# Altium PCB Patil_PCB_20181208.PcbDoc
Units mil, origin at the board's own origin, x right, y up, seen from the top; angles counter-clockwise.
Board outline 6000 x 4000 mil, 2 copper layers (Top Layer, Bottom Layer); 105 components, 53 nets, 253 pads, 31 vias.
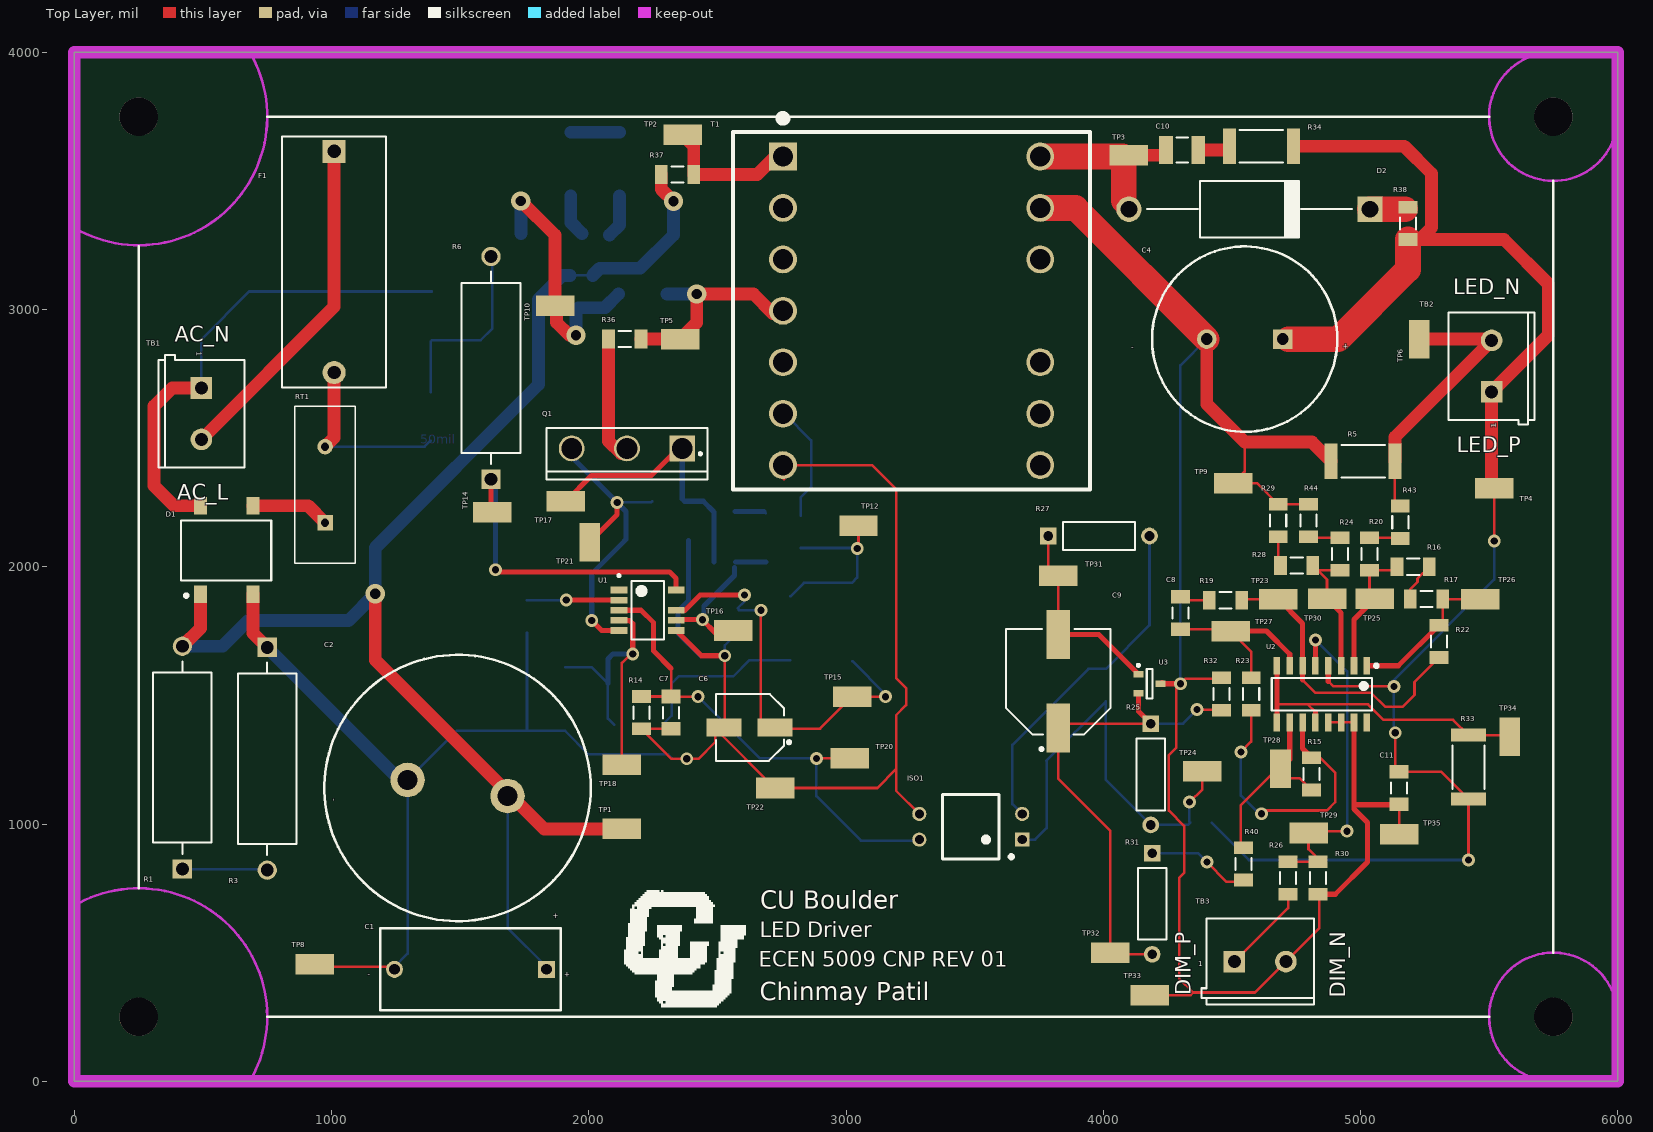
[diagram p0: Top Layer view]
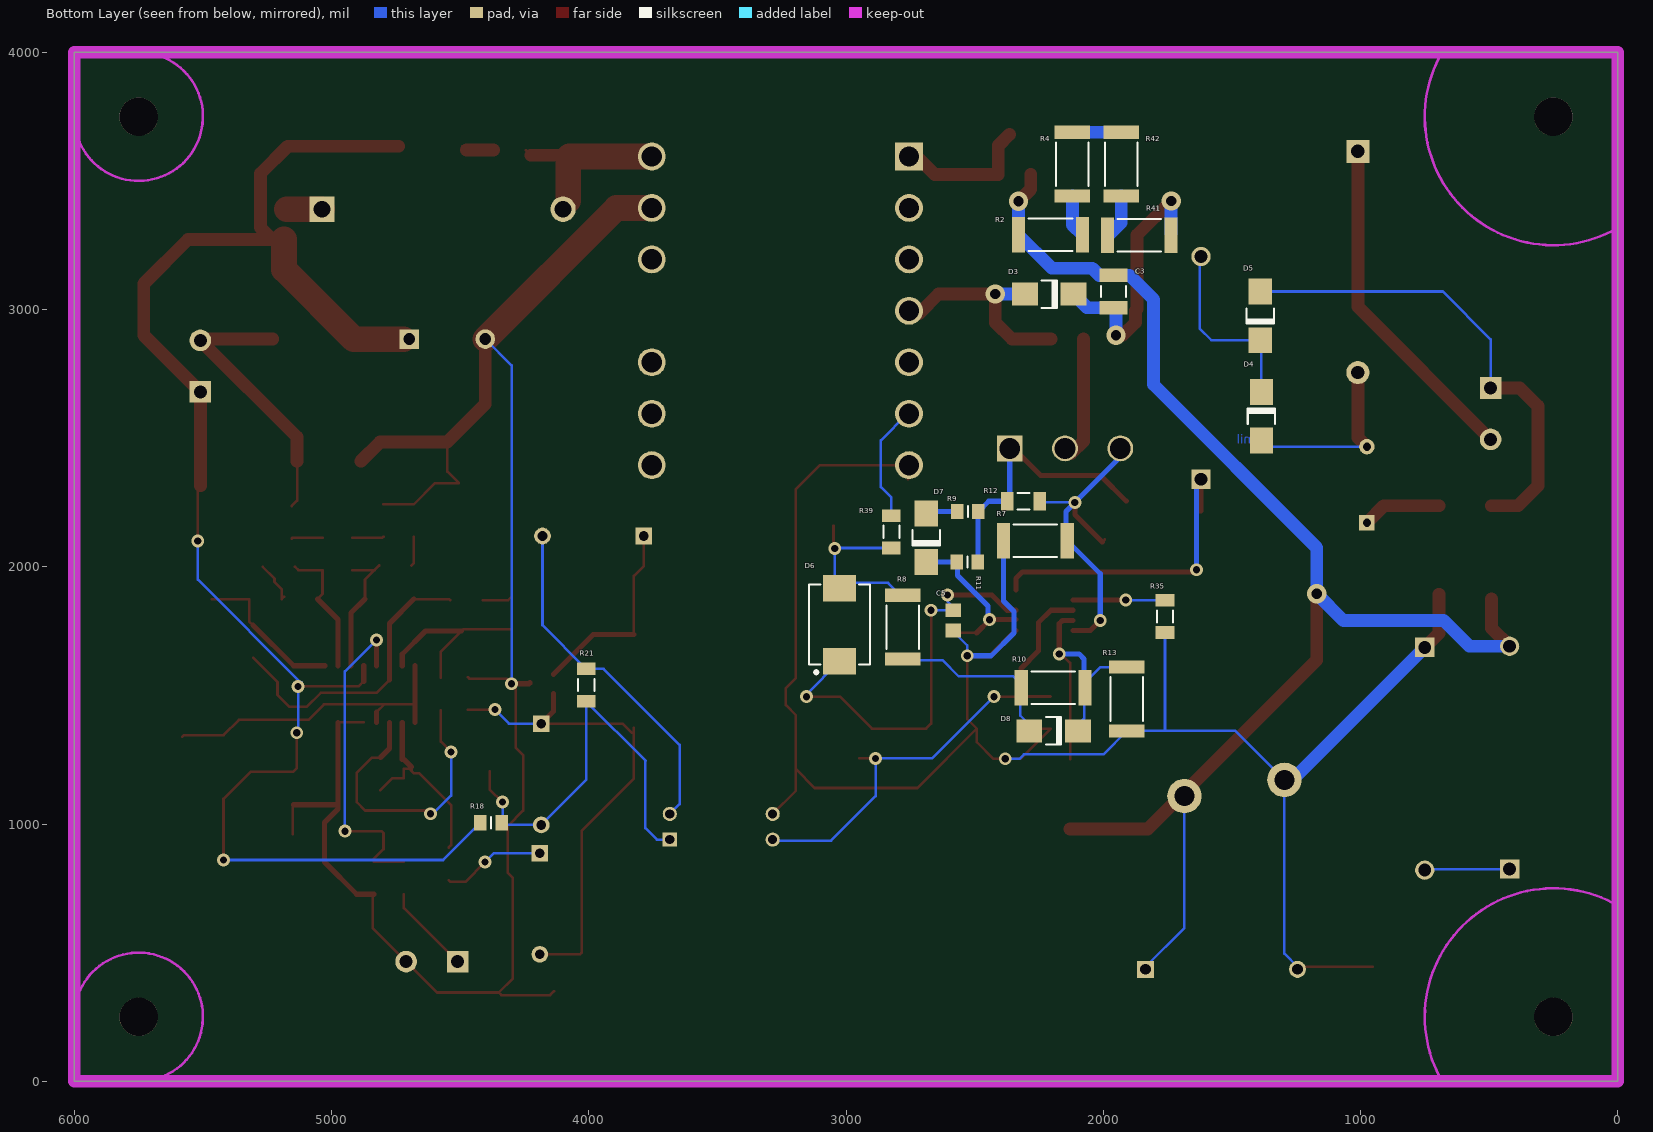
[diagram p1: Bottom Layer view, seen from below]

## Layer stack, top to bottom
Top Solder: solder mask 0.4, Solder Resist, Dk 3.5
Top Layer: signal copper 1.4
Dielectric 1: dielectric 12.6, FR-4, Dk 4.8
Bottom Layer: signal copper 1.4
Bottom Solder: solder mask 0.4, Solder Resist, Dk 3.5

## Board outline
0,0 0,4000 6000,4000 6000,0

## Design rules (kind name [scope] priority, off if disabled: settings)
BoardOutlineClearance [All] p1: gap=250 ignorepadtopadclearanceinfootprint=FALSE
Clearance [All] p1: gap=50 ignorepadtopadclearanceinfootprint=FALSE
HoleSize [All] p1: absolutevalues=TRUE maxlimit=300 minlimit=1 maxpercent=80.000 minpercent=20.000
PolygonConnect [All] p1: connectstyle=Relief reliefconductorwidth=10 reliefentries=4 polygonreliefangle="90 Angle" airgapwidth=10
RoutingVias [All] p1: holewidth=28 width=50 viastyle="Through Hole" minholewidth=28 minwidth=50 maxholewidth=28 maxwidth=50
SolderMaskExpansion [All] p1: expansion=4
UnRoutedNet [All] p1: checkbadconnections=TRUE
Width [All] p1: maxlimit=10 minlimit=10 preferedwidth=10
28 further rules are at their usual default settings.

## Classes and differential pairs
component class Patil_Sheet_2_20181105: C8 C9 C11 ISO1 R15 R16 R17 R18 R19 R20 R21 R22 R23 R24 R25 R26 R27 R28 R29 R30 R31 R32 R33 R40 R43 R44 TB3 TP23 TP24 TP25 TP26 TP27 TP28 TP29 TP30 TP31 TP32 TP33 TP34 TP35 U2 U3
component class Patil_Sheet_1_20181105: C1 C2 C3 C4 C5 C6 C7 C10 D1 D2 D3 D4 D5 D6 D7 D8 F1 Q1 R1 R2 R3 R4 R5 R6 R7 R8 R9 R10 R11 R12 R13 R14 R34 R35 R36 R37 R38 R39 R41 R42 RT1 T1 TB1 TB2 TP1 TP2 TP3 TP4 TP5 TP6 TP8 TP9 TP10 TP12 TP14 TP15 TP16 TP17 TP18 TP20 TP21 TP22 U1

## Components (designator, comment, footprint, x,y, rotation, side; value= is the part's Value field where it differs from the comment)
C1 "1 µF" "CAP-RAD-THRU-L17.5 X W7.8 X LS15.0 X H11.0MM" 1540,435 r180 top
C2 "150 µF" "CAP-SNAP_D25 X H35MM_A35" 1490,1140 r0 top
C3 "4.7 nF" CAP-1210M_IPC 1960,3070 r90 bottom
C4 "3.9 mF" "CAP-RAD-THRU-D18.0 X LS7.5 X H40.0MM" 4550,2885 r180 top
C5 "100 nF" CAP-0805M_IPC 2583.59,1791.57 r90 bottom
C6 "22 µF" CAPAE660X540M_CASE-D_IPC 2625,1375 r180 top
C7 "1 µF" CAP-1206M_IPC 2320,1432.8 r90 top
C8 "33 nF" CAP-1206M_IPC 4300,1820 r270 top
C9 "330 µF" CAPAE1030X1020M_CASE-G_IPC 3825,1555 r90 top
C10 "1 nF" CAP-1210M_IPC 4307.01,3620 r0 top
C11 "100 nF" CAP-1206M_IPC 5150,1139.96 r90 top
D1 "DF06S2" SOIC510P1040X260-4M_IPC 592.52,2065 r90 top
D2 "EGP30C" DIO-AXIAL-DO-201AD 4568.5,3390 r180 top
D3 "RS1M" DIODE-SMA-DO214AC 2210,3060 r0 bottom
D4 "RS1M" DIODE-SMA-DO214AC 1385,2585 r270 bottom
D5 "RS1M" DIODE-SMA-DO214AC 1390,2975 r90 bottom
D6 "ES3B" DIODE-SMC-DO214AB 3025,1775 r90 bottom
D7 "RS1A" DIODE-SMA-DO214AC 2688.59,2112.99 r90 bottom
D8 "RS1B" DIODE-SMA-DO214AC 2193.07,1361.93 r0 bottom
F1 "Fuse Holder" FUSE_HOLDER_3AG_4527 1010,3185 r270 top
ISO1 "FOD817A300W" DIP1016W7P254L51H57Q4A_IPC 3485,989.25 r90 top
Q1 "IPW90R340C3FKSA1" TO546P508X1588X2483-3A_IPC 2148.59,2460 r180 top
R1 "62.0 K" RES-AXIAL-2W_IPC 420,1257.99 r90 top
R2 "20.0 K" RES-2512M_IPC 2205,3290 r0 bottom
R3 "91.0 K" RES-AXIAL-2W_IPC 750,1253.54 r270 top
R4 "20.0 K" RES-2512M_IPC 2120,3565 r270 bottom
R5 "100m" RES-2512M_IPC 5010,2410 r0 top
R6 "2.00 K" RES-AXIAL-2W_IPC 1620,2773.07 r90 top
R7 "470 m" RES-2512M_IPC 2263.59,2100.94 r180 bottom
R8 "1.00 K" RES-2512M_IPC 2780,1765 r270 bottom
R9 "1.00" RES-0805M_IPC 2526.57,2214.56 r180 bottom
R10 "430 K" RES-2512M_IPC 2195,1530 r0 bottom
R11 "10.0" RES-0805M_IPC 2528.58,2018.5 r180 bottom
R12 "10.0 K" RES-1206M_IPC 2310,2254.56 r0 bottom
R13 "2.00 K" RES-2512M_IPC 1908.59,1485.94 r90 bottom
R14 "30.9 K" RES-1206M_IPC 2205,1432.8 r90 top
R15 "10.0 K" RES-1206M_IPC 4810,1195 r270 top
R16 "40.2 K" RES-1206M_IPC 5205,2000 r0 top
R17 "1.50 K" RES-1206M_IPC 5257.01,1874.37 r0 top
R18 "Jumper, 0805" RES-0805M_IPC 4380,1005 r180 bottom
R19 "10.0 K" RES-1206M_IPC 4475,1870 r180 top
R20 "1.00 K" RES-1206M_IPC 5035,2050 r90 top
R21 "1.43 K" RES-1206M_IPC 4010,1540 r270 bottom
R22 "301" RES-1206M_IPC 5305,1710 r270 top
R23 "10.0 K" RES-1206M_IPC 4575,1505 r270 top
R24 "1.00 K" RES-1206M_IPC 4920,2050 r90 top
R25 "13.7 K" RES-AXIAL-250mW_IPC 4185,1193.15 r270 top
R26 "10.0 K" RES-1206M_IPC 4718.58,790 r90 top
R27 "8.06 K" RES-AXIAL-250mW_IPC 3983.03,2119.56 r0 top
R28 "40.2 K" RES-1206M_IPC 4752.01,2005 r180 top
R29 "1.50 K" RES-1206M_IPC 4680,2180 r90 top
R30 "10.0 K" RES-1206M_IPC 4835,790 r90 top
R31 "8.06 K" RES-AXIAL-250mW_IPC 4190,690 r270 top
R32 "2.49 K" RES-1206M_IPC 4460,1505 r270 top
R33 "4.70 K" RES-2512M_IPC 5420,1221.42 r90 top
R34 "10.0 K" RES-2512M_IPC 4615,3635 r0 top
R35 "1.00 K" RES-1206M_IPC 1760,1807.2 r90 bottom
R36 "Jumper, 1206" RES-1206M_IPC 2140,2885 r0 top
R37 "Jumper, 1206" RES-1206M_IPC 2345,3525 r180 top
R38 "Jumper, 1206" RES-1206M_IPC 5185,3335 r90 top
R39 "Jumper, 1206" RES-1206M_IPC 2823.59,2135.94 r90 bottom
R40 "Jumper, 1206" RES-1206M_IPC 4545,845 r90 top
R41 "2.00 K" RES-2512M_IPC 1860,3289.02 r0 bottom
R42 "20.0 K" RES-2512M_IPC 1930,3565 r90 bottom
R43 "Jumper, 1206" RES-1206M_IPC 5155,2172.99 r90 top
R44 "Jumper, 1206" RES-1206M_IPC 4798.07,2180 r90 top
RT1 "12 Ohms" THERM-RADIAL-15.5MM_DIA_X6MM_THK 975,2319.17 r90 top
T1 "ETD29" TRANS508P3530X3520X2500-13A_IPC 3255,2995 r90 top
TB1 "INPUT" CONN_2-POS_TERMINAL_BLOCK_1729128 494.09,2595 r270 top
TB2 "LED MODULE" CONN_2-POS_TERMINAL_BLOCK_1729128 5510,2780 r90 top
TB3 "DIMMING VOLTAGE" CONN_2-POS_TERMINAL_BLOCK_1729128 4610,465 r0 top
TP1 "Test Point" TP_SMT_LOOP-5019_3D 2128.59,980.94 r0 top
TP2 "Test Point" TP_SMT_LOOP-5019_3D 2365,3680 r0 top
TP3 "Test Point" TP_SMT_LOOP-5019_3D 4100,3600 r0 top
TP4 "Test Point" TP_SMT_LOOP-5019_3D 5520,2305 r0 top
TP5 "Test Point" TP_SMT_LOOP-5019_3D 2355,2885 r0 top
TP6 "Test Point" TP_SMT_LOOP-5019_3D 5228.63,2885 r90 top
TP8 "Test Point" TP_SMT_LOOP-5019_3D 935,455 r0 top
TP9 "Test Point" TP_SMT_LOOP-5019_3D 4505,2325 r0 top
TP10 "Test Point" TP_SMT_LOOP-5019_3D 1870,3015 r180 top
TP12 "Test Point" TP_SMT_LOOP-5019_3D 3048.58,2159.56 r0 top
TP14 "Test Point" TP_SMT_LOOP-5019_3D 1625.05,2212.56 r180 top
TP15 "Test Point" TP_SMT_LOOP-5019_3D 3023.59,1495 r0 top
TP16 "Test Point" TP_SMT_LOOP-5019_3D 2562.09,1752.2 r0 top
TP17 "Test Point" TP_SMT_LOOP-5019_3D 1910.78,2255 r0 top
TP18 "Test Point" TP_SMT_LOOP-5019_3D 2128.44,1230.94 r0 top
TP20 "Test Point" TP_SMT_LOOP-5019_3D 3015,1255 r0 top
TP21 "Test Point" TP_SMT_LOOP-5019_3D 2003.58,2095.95 r270 top
TP22 "Test Point" TP_SMT_LOOP-5019_3D 2725,1140 r0 top
TP23 "Test Point" TP_SMT_LOOP-5019_3D 4680,1874.36 r180 top
TP24 "Test Point" TP_SMT_LOOP-5019_3D 4385,1205 r0 top
TP25 "Test Point" TP_SMT_LOOP-5019_3D 5055,1875 r0 top
TP26 "Test Point" TP_SMT_LOOP-5019_3D 5465,1874.36 r0 top
TP27 "Test Point" TP_SMT_LOOP-5019_3D 4495,1750 r0 top
TP28 "Test Point" TP_SMT_LOOP-5019_3D 4689.01,1215 r270 top
TP29 "Test Point" TP_SMT_LOOP-5019_3D 4798.07,965 r0 top
TP30 "Test Point" TP_SMT_LOOP-5019_3D 4870,1875 r0 top
TP31 "Test Point" TP_SMT_LOOP-5019_3D 3825,1965 r0 top
TP32 "Test Point" TP_SMT_LOOP-5019_3D 4027.76,500 r0 top
TP33 "Test Point" TP_SMT_LOOP-5019_3D 4180,335 r0 top
TP34 "Test Point" TP_SMT_LOOP-5019_3D 5580,1340 r90 top
TP35 "Test Point" TP_SMT_LOOP-5019_3D 5150,960 r0 top
U1 "NCP1340B3" SOIC100P600X175-9M 2228.59,1830.94 r0 top
U2 "TSM104WAID" SOIC127P600X175-16M_IPC 4850,1505 r270 top
U3 "TL431A" SOT95P230X124-3M_IPC 4180,1545 r0 top

## Footprints (in the part's own frame and the unit in brackets; to place one, negate y for a bottom-side part, rotate by r counter-clockwise, add the part's x,y. Pads: shape width x height; smd on the part's side, far side on the other; paste and mask are expansions set on the pad)
CAP-0805M_IPC [mm] "Chip Capacitor, C0805, Body 2.0x1.3mm, IPC Most Density"
  rect 1.35x1.55 smd: 1(-1,0) 2(1,0)
  body extent -1.1,-0.73 1.1,0.72, height 1.45
CAP-1206M_IPC [mm] "Chip Capacitor, C1206, Body 3.2x1.6mm, IPC Most Density"
  rect 1.35x1.9 smd: 1(-1.6,0) 2(1.6,0)
  silkscreen extent -0.55,-0.8 0.55,0.8, body extent -1.68,-0.87 1.67,0.86, height 1.9
CAP-1210M_IPC [mm] "Chip Capacitor, C1210, Body 3.2x2.5mm, IPC Most Density"
  rect 1.35x2.8 smd: 1(-1.6,0) 2(1.6,0)
  silkscreen extent -0.55,-1.25 0.55,1.25, body extent -1.7,-1.35 1.7,1.35, height 1.8
"CAP-RAD-THRU-D18.0 X LS7.5 X H40.0MM" [mil] "Capacitor, Radial Can, Dia.18.0mm, Height 40.0mm, Lead Space 7.5mm, Pin-1 Positive, Nichicon UHE Series"
  rect 76x76 hole 46: 1(-147.64,0)
  round 76 hole 46: 2(147.64,0)
  silkscreen extent -360,-360 360,360, body extent -354,-352 354,356, height 1575
"CAP-RAD-THRU-L17.5 X W7.8 X LS15.0 X H11.0MM" [mil] "Capacitor, Radial Film, Length 17.5mm, Width 7.8mm, Height 11.0mm, Lead Space 15.0mm, Pin-1 Positive, Panasonic ECW-F(D) Series"
  rect 66x66 hole 42: 1(-295.28,0)
  round 66 hole 42: 2(295.28,0)
  silkscreen extent -350,-159 350,159, body extent -344,-154 344,154, height 472
"CAP-SNAP_D25 X H35MM_A35" [mm] "Capacitor, Snap, 25 x 35mm, Nichicon A35 Size"
  round 3.4 hole 2: 1(4.936,-0.8) 2(-4.936,0.8)
  silkscreen extent -13.15,-13.15 13.15,13.15, body extent -13,-12.95 13,13.05, height 37
CAPAE660X540M_CASE-D_IPC [mm] "Capacitor, Alum Elec, Dia.6.3mm, Height 5.4mm, Base 6.6x6.6mm, Case-D, IPC Most Density"
  rect 3.45x1.8 smd: 1(-2.5,0) 2(2.5,0)
  silkscreen extent -4.05,-3.3 3.3,3.3, body extent -3.4,-3.4 3.4,3.4, height 5.4
CAPAE1030X1020M_CASE-G_IPC [mm] "Capacitor, Alum Elec, Dia.10.0mm, Height 10.2mm, Base 10.3x10.3mm, Case-G. IPC Most Density"
  rect 4.85x2.3 smd: 1(-4.6,0) 2(4.6,0)
  silkscreen extent -6.85,-5.15 5.15,5.15, body extent -5.25,-5.25 5.25,5.25, height 10.2
CONN_2-POS_TERMINAL_BLOCK_1729128 [mil] "CONN TERM BLOCK 2POS 5.08MM PCB"
  rect 84x84 hole 51.18: 1(-100,0)
  round 84 hole 51.18: 2(100,0)
  silkscreen extent -227,-167 209,167, body extent -222,-159 200,160, height 394
DIO-AXIAL-DO-201AD [mm] "Axial Device, Thru-Hole; 2 Leads; 23.8mm Pin Spacing"
  rect 2.5x2.5 hole 1.65: 1(-11.9,0)
  round 2.5 hole 1.65: 2(11.9,0)
  silkscreen extent -10.1,-2.8 10.1,2.8, body extent -5,-2.9 5,2.9, height 4.9
DIODE-SMA-DO214AC [mm] "DO-214-AC/SMA; 2 C-Bend Leads; Body 5.3 x 2.6 mm, inc. leads (LxW) Pin 1 Cathode"
  rect 2.55x2.3 smd: 1(-2.4,0) 2(2.4,0)
  silkscreen extent -0.75,-1.35 0.75,1.35, body extent -2.85,-1.43 2.85,1.43, height 2.95
DIODE-SMC-DO214AB [mm] "DO-214-AB/SMC; 2 C-Bend Leads; Body 7.94 x 5.9 mm, inc. leads (LxW) Pin 1 Cathode"
  rect 2.6x3.25 smd: 1(-3.6,0) 2(3.6,0)
  silkscreen extent -4.85,-3 3.95,3, body extent -4,-3.1 4,3.1, height 2.7
DIP1016W7P254L51H57Q4A_IPC [mm] "DIP Wide, 4-Pin, Row Spacing 10.16mm (400mil), Pitch 2.54mm (100mil), Body 5.1mm (201mil) X 7mm (276mil) Max, IPC MOST"
  rect 1.4x1.4 hole 0.9: 1(-1.27,-5.08)
  round 1.4 hole 0.9: 2(1.27,-5.08) 3(1.27,5.08) 4(-1.27,5.08)
  silkscreen extent -3.17,-4.1 3.17,2.8, body extent -2.55,-3.5 2.55,3.5, height 5.7
FUSE_HOLDER_3AG_4527 [mil] "FUSE HLDR CARTRIDGE 250V 5A PCB"
  rect 90x90 hole 52: 1(-430,0)
  round 90 hole 52: 2(430,0)
  silkscreen extent -488,-203 488,203, body extent -475,-191 476,191, height 425
RES-0805M_IPC [mm] "Chip Resistor, R0805, Body 2.0x1.3mm, IPC Most Density"
  rect 1.25x1.5 smd: 1(-1.05,0) 2(1.05,0)
  silkscreen extent 0,-0.55 0,0.55, body extent -1.1,-0.67 1.1,0.67, height 0.7
RES-1206M_IPC [mm] "Chip Resistor, R1206, Body 3.2x1.6mm, IPC Most Density"
  rect 1.25x1.85 smd: 1(-1.6,0) 2(1.6,0)
  silkscreen extent -0.6,-0.8 0.6,0.8, body extent -1.68,-0.87 1.67,0.86, height 0.84
RES-2512M_IPC [mm] "Chip Resistor, R2512, Body 6.3x3.2mm, IPC Most Density"
  rect 1.3x3.5 smd: 1(-3.15,0) 2(3.15,0)
  silkscreen extent -2.15,-1.6 2.15,1.6, body extent -3.25,-1.7 3.25,1.7, height 0.9
RES-AXIAL-2W_IPC [mm] "Axial 2W Device, Thru-Hole; 2 Leads; 20mm in Pin Spacing"
  rect 1.905x1.905 hole 1.27: 1(-11,0)
  round 1.905 hole 1.27: 2(11,0)
  silkscreen extent -9.5,-2.9 9.5,2.9, body extent -8.25,-2.75 8.25,2.75, height 6.25
RES-AXIAL-250mW_IPC [mm] "Axial 250mW Device, Thru-Hole; 2 Leads; 10mm Pin Spacing"
  rect 1.65x1.65 hole 0.95: 1(-5,0)
  round 1.65 hole 0.95: 2(5,0)
  silkscreen extent -3.55,-1.4 3.55,1.4, body extent -3.45,-1.29 3.45,1.29, height 3.3
SOIC100P600X175-9M [mm] "SOIC, 9-Leads, Body 5.30x3.90mm, Pitch 1.00mm, IPC Mosy Density"
  rect 1.65x0.65 smd: 1(-2.825,2) 2(-2.825,1) 3(-2.825,0) 4(-2.825,-1) 5(-2.825,-2) 6(2.825,-2) 7(2.825,-1) 8(2.825,0) 9(2.825,2)
  silkscreen extent -2.95,-2.9 1.6,3.54, body extent -2,-2.9 2,2.9, height 1.75
SOIC127P600X175-16M_IPC [mm] "SOIC, 16-Leads, Body W4.00xL10.00mm, Pitch 1.27mm, H1.75mm, IPC MOST Density"
  rect 1.75x0.65 smd: 1(-2.8,4.445) 2(-2.8,3.175) 3(-2.8,1.905) 4(-2.8,0.635) 5(-2.8,-0.635) 6(-2.8,-1.905) 7(-2.8,-3.175) 8(-2.8,-4.445) 9(2.8,-4.445) 10(2.8,-3.175) 11(2.8,-1.905) 12(2.8,-0.635) 13(2.8,0.635) 14(2.8,1.905) 15(2.8,3.175) 16(2.8,4.445)
  silkscreen extent -2.95,-4.95 1.6,5.54, body extent -2,-5 2,5, height 1.75
SOIC510P1040X260-4M_IPC [mm] "IC, 4-Leads, Body W6.35xmmL8.3mmxH2.6mm, Pitch 5.1mm, IPC Most Density"
  rect 1.7x1.3 smd: 1(-4.37,2.6) 2(-4.37,-2.6) 3(4.37,-2.6) 4(4.37,2.6)
  silkscreen extent -4.65,-4.4 2.9,4.5, body extent -3.3,-4.3 3.2,4.3, height 1.75
SOT95P230X124-3M_IPC [mm] "SOT23, 3-Leads, Body 2.92x2.30mm, Pitch 0.95mm, IPC Most Density"
  rect 1x0.65 smd: 1(-1.1,0.95) 2(-1.1,-0.95) 3(1.1,0)
  silkscreen extent -1.22,-1.45 0.28,1.95, body extent -0.7,-1.52 0.7,1.52, height 1.24
THERM-RADIAL-15.5MM_DIA_X6MM_THK [mil] "Inrush Current Limiter, 15.5 mm, Radial"
  rect 60x60 hole 32: 1(-147.64,0)
  round 60 hole 32: 2(147.64,0)
  silkscreen extent -305,-118 305,118, body extent -305,-118 305,118, height 699
TO546P508X1588X2483-3A_IPC [mm] "TO-247, 3-Pads, Body 5.08X15.88mm , IPC Most Density"
  rect 2.55x2.55 hole 2.05: 1(-5.46,0)
  round 2.55 hole 2.05: 2(0,0) 3(5.46,0)
  silkscreen extent -7.95,-2.02 7.95,3.08, body extent -8.13,-2.01 8.13,3.07, height 24.83
TP_SMT_LOOP-5019_3D [mm] "KEYSTONE 5019, Testpoint, SMT, Miniature, L-2.03 x W-3.81 x H-2.29, Small PCB FP"
  rect 3.8x2.03 smd: 1(0,0)
  rect 3.8x2.03 on Mech15: 1(0,0)
  body extent -1.9,-1.02 1.91,1.02, height 2.29
TRANS508P3530X3520X2500-13A_IPC [mm] "Transformer Bobin Horizontal, ETD 29, 13-Pads, Body 35.3mmX35.2mm , IPC Most Density"
  rect 2.75x2.75 hole 2: 1(15.24,12.7)
  round 2.75 hole 2: 2(15.24,-12.7) 2(15.24,-12.7) 3(10.16,12.7) 4(10.16,-12.7) 5(5.08,12.7) 6(5.08,-12.7) 7(0,12.7) 8(-5.08,-12.7) 9(-5.08,12.7) 10(-10.16,-12.7) 11(-10.16,12.7) 12(-15.24,-12.7) 13(-15.24,12.7)
  silkscreen extent -17.65,-17.6 19.35,17.65, body extent -17.65,-17.6 17.65,17.6, height 25

## Part data
C1: library part 16-0009-002, "Capacitor, Film, 1 µF, ±5%, 450 V, Metallized Polypropylene, Radial, Lead", Distributor Part Number=PCF1616-ND, Manufacturer=Panasonic, Manufacturer Part Number=ECW-FD2W105J, Package="Radial, Lead", Rated Voltage (V)="450 V", TempCo="Metallized Polypropylene", Tolerance=±5%, Distributor=Digi-Key, Type="Capacitor, Film"
C2: library part 16-0003-003, "Capacitor, Al. El., 150 µF, ±20%, 450 V, Radial, Snap", Distributor Part Number=493-17561-ND, Manufacturer=Nichicon, Manufacturer Part Number=LKX2W151MESA35, Package="Radial, Snap", Rated Voltage (V)="450 V", Tolerance=±20%, Distributor=Digi-Key, Notes="A35 size", Type="Capacitor, Al. El."
C3: library part 16-0010-003, "Capacitor, Ceramic, 4.7 nF, ±10%, 1000 V, X7R, 1210", Distributor Part Number=720-1057-1-ND, Manufacturer="Vishay Vitramon", Manufacturer Part Number=VJ1210Y472KXGAT5Z, Package=1210, Rated Voltage (V)="1000 V", TempCo=X7R, Tolerance=±10%, Distributor=Digi-Key, Type="Capacitor, Ceramic"
C4: library part 16-0006-007, "Capacitor, Al. El., 3.9 mF, ±20%, 35 V, Radial, Lead", Distributor Part Number=493-1602-ND, Manufacturer=Nichicon, Manufacturer Part Number=UHE1V392MHD, Package="Radial, Lead", Rated Voltage (V)="35 V", Tolerance=±20%, Distributor=Digi-Key, Type="Capacitor, Al. El."
C5: library part 16-0001-066, "Capacitor, Ceramic, 100 nF, ±10%, 50 V, X7R, 0805", Manufacturer=TDK, Manufacturer Part Number=C2012X7R1H104KT, Package=0805, Rated Voltage (V)="50 V", TempCo=X7R, Tolerance=±10%, Distributor="Lab Stock", Distributor Part Number=16-0001-066, Type="Capacitor, Ceramic"
C6: library part 16-0005-007, "Capacitor, Al. El., 22 µF, ±20%, 35 V, SMT", Distributor Part Number=PCE4025CT-ND, Manufacturer=Panasonic, Manufacturer Part Number=EEEFC1V220P, Package=SMT, Rated Voltage (V)="35 V", Tolerance=±20%, Distributor=Digi-Key, Notes="FC \"D\" Size", Type="Capacitor, Al. El."
C7: library part 16-0002-071, "Capacitor, Ceramic, 1 µF, ±10%, 16 V, X7R, 1206", Manufacturer=TDK, Manufacturer Part Number=C3216X7R1C105KT, Package=1206, Rated Voltage (V)="16 V", TempCo=X7R, Tolerance=±10%, Distributor="Lab Stock", Distributor Part Number=16-0002-071, Type="Capacitor, Ceramic"
C8: library part 16-0002-053, "Capacitor, Ceramic, 33 nF, ±10%, 50 V, X7R, 1206", Manufacturer=TDK, Manufacturer Part Number=C3216X7R1H333KT, Package=1206, Rated Voltage (V)="50 V", TempCo=X7R, Tolerance=±10%, Distributor="Lab Stock", Distributor Part Number=16-0002-053, Type="Capacitor, Ceramic"
C9: library part 16-0005-012, "Capacitor, Al. El., 330 µF, ±20%, 35 V, SMT", Distributor Part Number=PCE4029CT-ND, Manufacturer=Panasonic, Manufacturer Part Number=EEEFC1V331P, Package=SMT, Rated Voltage (V)="35 V", Tolerance=±20%, Distributor=Digi-Key, Notes="FC \"G\" Size", Type="Capacitor, Al. El."
C10: library part 16-0010-001, "Capacitor, Ceramic, 1 nF, ±10%, 1000 V, X7R, 1210", Distributor Part Number=720-1045-1-ND, Manufacturer="Vishay Vitramon", Manufacturer Part Number=VJ1210Y102KXGAT5Z, Package=1210, Rated Voltage (V)="1000 V", TempCo=X7R, Tolerance=±10%, Distributor=Digi-Key, Type="Capacitor, Ceramic"
C11: library part 16-0002-059, "Capacitor, Ceramic, 100 nF, ±10%, 50 V, X7R, 1206", Manufacturer=TDK, Manufacturer Part Number=C3216X7R1H104KT, Package=1206, Rated Voltage (V)="50 V", TempCo=X7R, Tolerance=±10%, Distributor="Lab Stock", Distributor Part Number=16-0002-059, Type="Capacitor, Ceramic"
D1: library part 13-0015-001, "Diode, Bridge, Std Recovery, DF06S2, 600 V, 2 A, SDIP-4", Distributor Part Number=DF06S2CT-ND, Manufacturer="ON Semi", Package=SDIP-4, Distributor=Digi-Key, Industry Number=DF06S2, I or P="2 A", Manufacturer Part Number=DF06S2, Type="Diode, Schottky", V (max)="600 V"
D2: library part 13-0023-001, "Diode, Fast Recovery, EGP30C, 150 V, 3 A, DO-201AD", Distributor Part Number=EGP30CCT-ND, Manufacturer="ON Semi", Package="DO-201AD, Axial", Distributor=Digi-Key, Industry Number=EGP30C, I or P="3 A", Manufacturer Part Number=EGP30C, Type="Diode, Fast Recovery", V (max)="150 V"
D3 D4 D5: library part 13-0001-007, "Diode, Fast Recovery, RS1M, 1000 V, 1 A, SMA", Distributor Part Number=RS1MFSCT-ND, Manufacturer="ON Semi", Package=SMA, Distributor=Digi-Key, Industry Number=RS1M, I or P="1 A", Manufacturer Part Number=RS1M, Type="Diode, Fast Recovery", V (max)="1000 V"
D6: library part 13-0026-002, "Diode, Fast Recovery, ES3B, 100 V, 3 A, SMC", Distributor Part Number=ES3BFSCT-ND, Manufacturer="ON Semiconductor", Package=SMC, Distributor=Digi-Key, Industry Number=ES3B, I or P="3 A", Manufacturer Part Number=ES3B, Type="Diode, Fast Recovery", V (max)="100 V"
D7: library part 13-0001-001, "Diode, Fast Recovery, RS1A, 50 V, 1 A, SMA", Distributor Part Number=RS1ACT-ND, Manufacturer="ON Semi", Package=SMA, Distributor=Digi-Key, Industry Number=RS1A, I or P="1 A", Manufacturer Part Number=RS1A, Type="Diode, Fast Recovery", V (max)="50 V"
D8: library part 13-0001-002, "Diode, Fast Recovery, RS1B, 100 V, 1 A, SMA", Distributor Part Number=RS1BFSCT-ND, Manufacturer="ON Semi", Package=SMA, Distributor=Digi-Key, Industry Number=RS1B, I or P="1 A", Manufacturer Part Number=RS1B, Type="Diode, Fast Recovery", V (max)="100 V"
F1: library part 18-0012-001, "Fuse Holder, TH, 5mm, 3AG", Distributor Part Number=36-4527-ND, Manufacturer="Keystone Electronics", Manufacturer Part Number=4527, Package=TH, Distributor=Digi-Key, Industry Name="Fuse Holder", Mounting Type=3AG, Type=5mm
ISO1: library part 14-0002-002, "Opto-coupler, FOD817A300W, DIP, Wide Lead", Distributor Part Number=FOD817A300W-ND, Manufacturer="ON Semi", Package="DIP, Wide Lead", Distributor=Digi-Key, Industry Number=FOD817A300W, Manufacturer Part Number=FOD817A300W, Type=Opto-coupler
Q1: library part 10-0016-002, "MOSFET, N-Channel, IPW90R340C3FKSA1, 900 V, 340 mOhm, TO-247", Current/ Resistance Description="340 mOhm", Distributor Part Number=IPW90R340C3FKSA1-ND, Manufacturer=Infineon, Package=TO-247, Distributor=Digi-Key, Industry Number=IPW90R340C3FKSA1, Mfr Part Number=IPW90R340C3FKSA1, Polarity=N-Channel, Type=MOSFET, Vce/ds (max)="900 V"
R1: library part 15-0005-124, "Resistor, TH, 62.0 K, 5%, 2 W, MO, Axial", Distributor Part Number=62KW-2-ND, Manufacturer=Yageo, Manufacturer Part Number=RSF200JB-73-62K, Package=Axial, Rated Power (W)="2 W", Tolerance=5%, Composition=MO, Distributor=Digi-Key, Type="Resistor, TH"
R2 R4 R42: library part 15-0004-129, "Resistor, SMT, 20.0 K, 5%, 1 W, 2512", Package=2512, Rated Power (W)="1 W", Tolerance=5%, Distributor="Lab Stock", Distributor Part Number=15-0004-129, Type="Resistor, SMT"
R3: library part 15-0005-128, "Resistor, TH, 91.0 K, 5%, 2 W, MO, Axial", Distributor Part Number=91KW-2-ND, Manufacturer=Yageo, Manufacturer Part Number=RSF200JB-73-91K, Package=Axial, Rated Power (W)="2 W", Tolerance=5%, Composition=MO, Distributor=Digi-Key, Type="Resistor, TH"
R5: library part 15-0012-001, "Resistor, SMT, 100m, 1%, 1 W, 2512", Distributor Part Number=311-0.1TCT-ND, Manufacturer=Yageo, Manufacturer Part Number=RL2512FK-070R1L, Package=2512, Rated Power (W)="1 W", Tolerance=1%, Distributor=Digi-Key, Type="Resistor, SMT"
R6: library part 15-0005-088, "Resistor, TH, 2.00 K, 5%, 2 W, MO, Axial", Distributor Part Number=2.0KW-2-ND, Manufacturer=Yageo, Manufacturer Part Number=RSF200JB-73-2K, Package=Axial, Rated Power (W)="2 W", Tolerance=5%, Composition=MO, Distributor=Digi-Key, Type="Resistor, TH"
R7: library part 15-0012-003, "Resistor, SMT, 470 m, 1%, 1 W, 2512", Distributor Part Number=311-0.47TCT-ND, Manufacturer=Yageo, Manufacturer Part Number=RL2512FK-070R47L, Package=2512, Rated Power (W)="1 W", Tolerance=1%, Distributor=Digi-Key, Type="Resistor, SMT"
R8: library part 15-0004-098, "Resistor, SMT, 1.00 K, 5%, 1 W, 2512", Package=2512, Rated Power (W)="1 W", Tolerance=5%, Distributor="Lab Stock", Distributor Part Number=15-0004-098, Type="Resistor, SMT"
R9: library part 15-0002-001, "Resistor, SMT, 1.00, 1%, 125 mW, 0805", Manufacturer=Yageo, Package=0805, Rated Power (W)="125 mW", Tolerance=1%, Distributor="Lab Stock", Distributor Part Number=15-0002-001, Type="Resistor, SMT"
R10: library part 15-0004-161, "Resistor, SMT, 430 K, 5%, 1 W, 2512", Package=2512, Rated Power (W)="1 W", Tolerance=5%, Type="Resistor, SMT"
R11: library part 15-0002-097, "Resistor, SMT, 10.0, 1%, 125 mW, 0805", Manufacturer=Yageo, Package=0805, Rated Power (W)="125 mW", Tolerance=1%, Distributor="Lab Stock", Distributor Part Number=15-0002-097, Type="Resistor, SMT"
R12 R15 R19 R23 R26 R30: library part 15-0003-385, "Resistor, SMT, 10.0 K, 1%, 250 mW, 1206", Manufacturer=Yageo, Package=1206, Rated Power (W)="250 mW", Tolerance=1%, Distributor="Lab Stock", Distributor Part Number=15-0003-385, Type="Resistor, SMT"
R13 R41: library part 15-0004-105, "Resistor, SMT, 2.00 K, 5%, 1 W, 2512", Package=2512, Rated Power (W)="1 W", Tolerance=5%, Distributor="Lab Stock", Distributor Part Number=15-0004-105, Type="Resistor, SMT"
R14: library part 15-0003-432, "Resistor, SMT, 30.9 K, 1%, 250 mW, 1206", Manufacturer=Yageo, Package=1206, Rated Power (W)="250 mW", Tolerance=1%, Distributor="Lab Stock", Distributor Part Number=15-0003-432, Type="Resistor, SMT"
R16 R28: library part 15-0003-443, "Resistor, SMT, 40.2 K, 1%, 250 mW, 1206", Manufacturer=Yageo, Package=1206, Rated Power (W)="250 mW", Tolerance=1%, Distributor="Lab Stock", Distributor Part Number=15-0003-443, Type="Resistor, SMT"
R17 R29: library part 15-0003-306, "Resistor, SMT, 1.50 K, 1%, 250 mW, 1206", Manufacturer=Yageo, Package=1206, Rated Power (W)="250 mW", Tolerance=1%, Distributor="Lab Stock", Distributor Part Number=15-0003-306, Type="Resistor, SMT"
R18: library part 15-0001-001, Package=0805
R20 R24 R35: library part 15-0003-289, "Resistor, SMT, 1.00 K, 1%, 250 mW, 1206", Manufacturer=Yageo, Package=1206, Rated Power (W)="250 mW", Tolerance=1%, Distributor="Lab Stock", Distributor Part Number=15-0003-289, Type="Resistor, SMT"
R21: library part 15-0003-304, "Resistor, SMT, 1.43 K, 1%, 250 mW, 1206", Manufacturer=Yageo, Package=1206, Rated Power (W)="250 mW", Tolerance=1%, Distributor="Lab Stock", Distributor Part Number=15-0003-304, Type="Resistor, SMT"
R22: library part 15-0003-239, "Resistor, SMT, 301, 1%, 250 mW, 1206", Manufacturer=Yageo, Package=1206, Rated Power (W)="250 mW", Tolerance=1%, Distributor="Lab Stock", Distributor Part Number=15-0003-239, Type="Resistor, SMT"
R25: library part 15-0007-398, "Resistor, TH, 13.7 K, 1%, 250 mW, MF, Axial", Distributor Part Number=13.7KXBK-ND, Manufacturer=Yageo, Manufacturer Part Number=MFR-25FBF52-13K7, Package=Axial, Rated Power (W)="250 mW", Tolerance=1%, Composition=MF, Distributor=Digi-Key, Type="Resistor, TH"
R27 R31: library part 15-0007-376, "Resistor, TH, 8.06 K, 1%, 250 mW, MF, Axial", Distributor Part Number=8.06KXBK-ND, Manufacturer=Yageo, Manufacturer Part Number=MFR-25FBF52-8K06, Package=Axial, Rated Power (W)="250 mW", Tolerance=1%, Composition=MF, Distributor=Digi-Key, Type="Resistor, TH"
R32: library part 15-0003-327, "Resistor, SMT, 2.49 K, 1%, 250 mW, 1206", Manufacturer=Yageo, Package=1206, Rated Power (W)="250 mW", Tolerance=1%, Distributor="Lab Stock", Distributor Part Number=15-0003-327, Type="Resistor, SMT"
R33: library part 15-0004-114, "Resistor, SMT, 4.70 K, 5%, 1 W, 2512", Package=2512, Rated Power (W)="1 W", Tolerance=5%, Distributor="Lab Stock", Distributor Part Number=15-0004-114, Type="Resistor, SMT"
R34: library part 15-0004-122, "Resistor, SMT, 10.0 K, 5%, 1 W, 2512", Package=2512, Rated Power (W)="1 W", Tolerance=5%, Distributor="Lab Stock", Distributor Part Number=15-0004-122, Type="Resistor, SMT"
R36 R37 R38 R39 R40 R43 R44: library part 15-0001-002, Package=0805
RT1: library part 15-0010-003, "Inrush Limiter, 12 Ohms, ±20%, 3 A, 15.5 mm, Radial", Distributor Part Number=317-1200-ND, Manufacturer=Cantherm, Manufacturer Part Number=MF72-012D13, Package=Radial, Rated Power (W)="3 A", Tolerance=±20%, Composition="15.5 mm", Distributor=Digi-Key, Type="Inrush Limiter"
T1: library part 17-0002-002, "Bobbin, ETD29, Horzontal, 13 Pins", Distributor Part Number=495-5455-ND, Manufacturer=TDK/EPCOS, Manufacturer Part Number=B66359X1014T001, Pins-Type-Color="13 Pins", Core Type=Bobbin, Distributor=Digi-Key, Mounting=Horzontal, Package=ETD29
TB1 TB2 TB3: library part 18-0008-001, "Terminal Block, 2 Pos., Vertical, 14-30 AWG, 5.08 mm", Color="5.08 mm", Distributor Part Number=277-1247-ND, Manufacturer="Phoenix Contact", Manufacturer Part Number=1729128, Package="2 Pos.", Distributor=Digi-Key, Industry Name="Terminal Block", Mounting Type="14-30 AWG", Type=Vertical
TP1 TP2 TP3 TP4 TP5 TP6 TP8 TP9 TP10 TP12 TP14 TP15 TP16 TP17 TP18 TP20 TP21 TP22 TP23 TP24 TP25 TP26 TP27 TP28 TP29 TP30 TP31 TP32 TP33 TP34 TP35: library part 18-0011-002, "Test Point, SMT, Miniature", Distributor Part Number=36-5019CT-ND, Manufacturer="Keystone Electronics", Manufacturer Part Number=5019, Package=SMT, Distributor=Digi-Key, Industry Name="Test Point", Mounting Type="Surface Mount", Type=Miniature
U1: library part 11-0021-001, "Controller, PWM, NCP1340B3, SOIC-9", Distributor Part Number=NCP1340B3D1R2GOSCT-ND, Manufacturer="On Semi", Mfr Part Number=NCP1340B3D1R2G, Package=SOIC-9, Distributor=Digi-Key, Function="Controller, PWM", Industry Number=NCP1340B3
U2: library part 11-0006-006, "Op-Amp With Reference, TSM104WAID, Quad, Low Offset, SOIC-16", Distributor Part Number=296-21202-1-ND, Manufacturer=TI, Mfr Part Number=TSM104WAIDR, Package=SOIC-16, Voltage Output="Low Offset", Configuration=Quad, Distributor=Digi-Key, Function="Op-Amp With Reference", Industry Number=TSM104WAID
U3: library part 11-0008-006, "Shunt Regulator, TL431A, Adjustable, 2.495 V, 1%, SOT-23-3", Distributor Part Number=296-17328-1-ND, Manufacturer=TI, Mfr Part Number=TL431ACDBZR, Package=SOT-23-3, Tolerance=1%, Voltage Output="2.495 V", Configuration=Adjustable, Distributor=Digi-Key, Function="Shunt Regulator", Industry Number=TL431A

## Free pads (board coordinates)
  round 149.5 hole 149.5 unplated: 4(250,250) 4(250,3750) 4(5750,250) 4(5750,3750)

## Via types
v1: diameter 50, hole 28, Top Layer to Bottom Layer, 26 vias
v2: diameter 75, hole 40, Top Layer to Bottom Layer, 5 vias

## Nets (pads, with @x,y where several pads share a name; then routed paths per layer and width w, separated by ;. In a path a pad name is that pad's centre, name@x,y a point inside that pad or via, vN(x,y) a via of type N, cw(c..) or ccw(c..) an arc to the next point about the centre after c; other vN are vias at no path point)
CS_Pin: Q1.3 R7.2 R12.1 TP21.1@2003.58,2095.95 U1.5 | length 1297.4
  Top Layer w10: TP21.1@1993.59,2105.94 TP21.1@2003.58,2095.95
  Top Layer w20: TP21.1@2003.58,2095.95 2110.35,2202.72 v1(2110.35,2250) ; v1(2011.58,1790.94) 2050.32,1752.2 U1.5
  Bottom Layer w10: Q1.3@1910.04,2440 Q1.3@1919.02,2431.02 ; Q1.3@1933.63,2426.73 Q1.3 ; v1(2110.35,2250) 2242.44,2250 R12.1 ; R7.2 R7.2@2145,2106.37
  Bottom Layer w20: Q1.3@1933.63,2426.73 v1(2110.35,2250) 2145,2215.35 R7.2@2145,2106.37 ; v1(2011.58,1790.94) 2011.58,1972.95 R7.2
DRV_Pin: Q1.1 R9.2 R11.2 R12.2 TP17.1@1910.78,2255 | length 1072.7
  Top Layer w10: 2192.16,2354.8 2192.36,2355 ; Q1.1@2348.27,2460 Q1.1
  Top Layer w20: TP17.1@1910.78,2255 2010.59,2354.8 2192.16,2354.8 ; 2192.36,2355 2243.27,2355 Q1.1@2348.27,2460
  Bottom Layer w10: R12.2@2363.55,2264.01 R12.2 ; R9.2 R9.2@2487.24,2212.56
  Bottom Layer w20: R12.2@2363.55,2264.01 Q1.1 ; R12.2 2445.24,2254.56 R9.2 ; R11.2 R9.2@2487.24,2212.56
FB_Pin: C7.2 ISO1.4 R14.2 TP20.1@3015,1255 U1.3 | length 1933.5
  Top Layer w10: R14.2 C7.2 ; 2320,1605 C7.2 ; v1(2425,1495) 2320.79,1495 C7.2 ; v1(2885,1255) TP20.1@2948.74,1255
  Top Layer w20: U1.3 2203.59,1830.94 2252.33,1782.2 2252.33,1672.67 2320,1605
  Bottom Layer w10: v1(2425,1495) 2665,1255 v1(2885,1255) 2885,1107.99 3057.99,935 3280.75,935 ISO1.4
FMAX: R35.2 U1.2 | length 357.4
  Top Layer w20: v1(1912.52,1870.31) U1.2
  Bottom Layer w10: R35.2 1760.12,1870.31 v1(1912.52,1870.31)
GNDP: C1.2 C2.2 C5.1 C6.2 C7.1 D1.2 ISO1.3 R3.1 R7.1 R13.1 R14.1 R35.1 T1.13 TP8.1@935,455 TP22.1@2725,1140 U1.6 | length 8090.3
  Top Layer w10: TP8.1@952.17,445 C1.2@1244.45,445 ; C7.1 R14.1 2321.26,1253.54 v1(2380.71,1253.54) 2427.28,1253.54 2491.74,1318 C6.2@2491.74,1370.94 ; v1(2528.58,1654.21) 2528.58,1407.79 C6.2@2491.74,1370.94 ; T1.13@2715,2385 2759.02,2340.98 ; T1.13 3101.97,2395 3195,2301.97 3195,1567.27 3234.13,1528.14 3234.13,1461.86 3195,1422.73 3195,1213.27 ; ISO1.3 3195,1129.25 3195,1213.27 ; C6.2@2491.74,1370.94 2722.68,1140 2725,1140 3121.73,1140 3195,1213.27
  Top Layer w20: U1.6 2437.8,1654.21 v1(2528.58,1654.21)
  Top Layer w50: D1.2 694.88,1741.73 R3.1
  Bottom Layer w10: C1.2@1244.45,445 1295.68,496.24 C2.2 1486.12,1361.93 1760,1361.93 ; R35.1 1760,1361.93 ; v1(2380.71,1253.54) 2325.99,1253.54 2308.59,1270.94 1999.57,1270.94 R13.1 1760,1361.93 ; v1(2528.58,1654.21) 2528.58,1694.37 C5.1@2583.59,1749.37
  Bottom Layer w20: R7.1 2387.6,1866.55 2347.01,1825.96 2347.01,1742.95 2435.75,1654.21 v1(2528.58,1654.21)
  Bottom Layer w50: R3.1 1265.12,1171.5 C2.2
GNDS: C4.2 C11.1 R5.1 R29.2 R30.1 R32.1 R44.2 T1.4 TB3.2 TP9.1@4505,2325 TP33.1@4180,335 TP35.1@5150,960 U2.13 U2.14 U2.15 U3.3 | length 7264.9
  Top Layer w10: TP33.1@4135,350 4150,335 4340,335 4350,345 ; U3.3 U3.3@4228.31,1550 ; R32.1@4470,1570.59 4464.26,1564.86 4319.86,1564.86 v1(4300,1545) 4284.61,1529.61 4284.61,1297.15 4255,1267.55 4255,1051.86 4314.33,992.53 4314.33,809.74 4295,790.41 4295,400 4350,345 ; 4550,2485 4550,2370 4505,2325 4597.99,2325 R29.2 R44.2 ; R30.1 4840,722.01 4840,595 TB3.2 4590,345 4350,345 ; U2.13 U2.14 U2.15 ; C11.1@5148.03,1075 C11.1 TP35.1@5150,960
  Top Layer w20: U3.3@4228.31,1550 4233.31,1545 v1(4300,1545) ; R30.1 4902.01,727.01 5027.81,852.81 5027.81,1005.32 4975,1058.14 4975,1075 ; U2.15 4975,1075 ; C11.1@5148.03,1075 4975,1075
  Top Layer w50: C4.2 4402.36,2632.63 4550,2485 4810.99,2485 R5.1
  Top Layer w100: T1.4 3892.36,3395 C4.2
  Bottom Layer w10: v1(4300,1545) 4300,2782.64 C4.2
HV_Pin_1: D4.2 F1.2 RT1.2 | length 722.5
  Top Layer w50: RT1.2 1010,2501.81 F1.2
  Bottom Layer w10: RT1.2 1361.3,2466.81 D4.2
HV_Pin_2: D1.4 D5.2 TB1.1 | length 1897.5
  Top Layer w50: D1.4 387.66,2237.05 310,2314.7 310,2624.29 380.71,2695 TB1.1
  Bottom Layer w10: TB1.1 494.09,2884.09 680,3070 1389.49,3070 D5.2
NetC1_1: C1.1 C2.1 C3.2 D1.1 R1.2 R2.2 R37.2 TP1.1@2128.59,980.94 | length 5565.5
  Top Layer w50: R1.2 490.16,1761.22 D1.1@490.16,1874.37 ; v2(1170,1895) 1170,1637.82 1826.87,980.94 TP1.1@2128.59,980.94 ; R37.2 2282.01,3467.99 v2(2329.02,3420.98)
  Bottom Layer w10: C2.1@1684.32,1123.5 C2.1 1684.32,595.68 C1.1@1835,445 ; C3.2@1926.51,3132.99 C3.2 2015.25,3132.99
  Bottom Layer w50: R1.2 576.02,1691.06 676.54,1791.57 1066.57,1791.57 v2(1170,1895) 1170,2073.97 1804.84,2708.82 1804.84,3039.61 1898.23,3132.99 C3.2@1926.51,3132.99 ; 2015.25,3132.99 2042.53,3160.28 2199.29,3160.28 R2.2 v2(2329.02,3420.98)
NetC3_1: C3.1 D3.1 R41.1 TP10.1@1870,3015 | length 1055.6
  Top Layer w10: TP10.1@1868.27,3001.73 TP10.1@1875,2995 ; v2@1925,2900 v2(1950,2900)
  Top Layer w50: v2(1735.98,3422.28) 1868.27,3290 TP10.1@1868.27,3001.73 ; TP10.1@1875,2995 1875,2950 v2@1925,2900
  Bottom Layer w10: R41.1@1725.98,3285 R41.1@1735.98,3295 ; C3.1@1950,2997.01 C3.1
  Bottom Layer w50: R41.1@1735.98,3295 v2(1735.98,3422.28) ; v2(1950,2900) C3.1@1950,2997.01 ; C3.1 2062.52,3007.01 D3.1
NetC8_1: C8.1 R19.2 | length 117.4
  Top Layer w10: C8.1 4312.99,1870 R19.2
NetC8_2: C8.2 R23.1 TP27.1@4495,1750 U2.7 | length 725.1
  Top Layer w10: C8.2 4487.99,1757.01 4495,1750 4575,1670 R23.1
  Top Layer w20: TP27.1@4495,1750 4635,1750 4725,1660 U2.7
NetC9_1: C9.1 R25.1 R31.2 R32.2 TP32.1@4027.76,500 U3.2 | length 1934.5
  Top Layer w10: C9.1 3825,1176 4027.76,973.24 4027.76,500 4034.61,493.15 R31.2 ; C9.1@3833.15,1355 3868.15,1390 R25.1 ; v1(4364.61,1444.61) R32.2@4470,1444.61
  Top Layer w20: U3.2 4136.69,1438.31 R25.1
  Bottom Layer w10: R25.1 4310,1390 v1(4364.61,1444.61)
NetC9_2: C9.2 R27.1 TP31.1@3825,1965 U3.1 | length 769
  Top Layer w10: R27.1 3786.18,2003.82 3825,1965 3825,1905.94 ; C9.2 3825,1900
  Top Layer w20: C9.2 3982.99,1736.1 U3.1
NetC10_1: C10.1 D2.2 T1.2 TP3.1@4100,3600 | length 709.5
  Top Layer w10: D2.2@4056.5,3400 D2.2@4080,3423.5 ; TP3.1@4062.5,3582.5 TP3.1@4075,3595 ; C10.1@4224.01,3600 C10.1
  Top Layer w50: TP3.1@4080,3600 C10.1@4224.01,3600
  Top Layer w100: T1.2@3755,3595 TP3.1@4075,3595 ; TP3.1@4062.5,3582.5 4080,3565 D2.2@4080,3423.5
NetC10_2: C10.2 R34.1 | length 127.2
  Top Layer w10: R34.1@4475.98,3620 R34.1
  Top Layer w50: C10.2 R34.1@4475.98,3620
NetD1_3: D1.3 RT1.1 | length 307.3
  Top Layer w50: D1.3 909.49,2237.05 RT1.1
NetD2_1: D2.1 R38.2 | length 150.1
  Top Layer w10: R38.2@5172.99,3390 R38.2@5182.99,3400
  Top Layer w100: D2.1 R38.2@5172.99,3390
NetD3_2: D3.2 R36.2 T1.7 TP5.1@2355,2885 | length 795.5
  Top Layer w50: R36.2 2355,2885 2420,2950 v2(2420,3060) 2640,3060 T1.7@2715,2985
  Bottom Layer w50: D3.2 v2(2420,3060)
NetD4_1: D4.1 D5.1 R6.2 | length 739.1
  Bottom Layer w10: D4.1 1385,2875.51 D5.1 1579.37,2880.51 1625,2926.14 1625,3201.14 R6.2
NetD7_1: D7.1 R11.1 TP16.1@2562.09,1752.2 U1.7 | length 615.7
  Top Layer w10: TP16.1@2493.04,1742.95 TP16.1@2562.09,1742.95
  Top Layer w20: U1.7@2339.81,1794.41 v1(2441.58,1794.41) TP16.1@2493.04,1742.95
  Bottom Layer w10: v1(2441.58,1794.41) v1@2447.6,1800.43
  Bottom Layer w20: v1@2447.6,1800.43 2447.6,1846.95 2566.85,1966.19 R11.1@2566.85,1995.94 ; R11.1 D7.1
NetD7_2: D7.2 R9.1 | length 123.6
  Bottom Layer w10: D7.2@2681.5,2214.56 D7.2
  Bottom Layer w20: R9.1 D7.2@2681.5,2214.56
NetD8_1: D8.1 R10.1 R13.2 TP18.1@2128.44,1230.94 U1.4 | length 1187.1
  Top Layer w10: TP18.1@2128.59,1250.94 2128.59,1625.94 v1@2167.37,1664.73 ; v1(2171.16,1660.94) v1@2183.59,1673.37
  Top Layer w20: U1.4 2158.1,1791.57 2171.16,1778.52 v1(2171.16,1660.94)
  Bottom Layer w10: R13.2 2010.55,1609.96 2074.57,1545.94 2074.57,1409.96 D8.1@2098.59,1385.94
  Bottom Layer w20: R10.1@2074.57,1545.94 2074.57,1641.93 2093.59,1660.94 v1(2171.16,1660.94)
NetD8_2: D8.2 R8.2 R10.2 | length 673.8
  Bottom Layer w10: D8.2@2287.56,1385.94 2322.6,1420.98 2322.6,1545.94 2351.66,1575 2458.14,1575 2458.92,1574.21 2561.72,1574.21 2624.44,1636.93 R8.2@2783.59,1636.93
NetF1_1: F1.1 TB1.2 | length 1333.7
  Top Layer w50: TB1.2 1010,3010.91 1010,3390 F1.1
NetISO1_1: ISO1.1 R18.2 R21.2 R25.2 TP24.1@4385,1205 | length 1635.2
  Top Layer w10: v1(4335,1085) 4385,1135 TP24.1@4385,1205
  Bottom Layer w10: ISO1.1 3735,939.25 3780,984.25 3780,1245 3779,1246 R21.2 4010,1171.3 R25.2 4329.96,996.3 R18.2 4335,1008.66 v1(4335,1085)
NetISO1_2: ISO1.2 R21.1 R27.2 | length 1357.1
  Bottom Layer w10: ISO1.2 3646.47,1077.78 3646.47,1307.56 3941.91,1602.99 R21.1 4179.88,1772.87 R27.2
NetQ1_2: Q1.2 R36.1 | length 464.9
  Top Layer w50: R36.1 2077.01,2487.99 Q1.2@2125,2440
NetR1_1: R1.1 R3.2 | length 331.8
  Bottom Layer w10: R1.1 745.55,824.92 R3.2
NetR2_1: R2.1 R4.2 | length 167.1
  Bottom Layer w50: R2.1 2120,3329.02 R4.2
NetR4_1: R4.1 R42.2 | length 190
  Bottom Layer w50: R42.2 R4.1
NetR6_1: R6.1 TP14.1@1625.05,2212.56 U1.9 | length 1264.4
  Top Layer w10: TP14.1@1620,2217.6 TP14.1@1625.05,2212.56 ; v1@1625.04,1988.54 v1(1637.01,1988.54)
  Top Layer w20: TP14.1@1620,2217.6 R6.1 ; v1@1631.16,1980.31 2314.33,1980.31 2339.81,1954.84 U1.9
  Bottom Layer w10: R6.1 R6.1@1637.01,2322.99
  Bottom Layer w20: v1(1637.01,1988.54) R6.1@1637.01,2322.99
NetR15_1: R15.1 R23.2 U2.11 | length 1144.3
  Top Layer w10: v1(4535,1280) 4575,1320 R23.2 ; v1(4615,1040) 4627.4,1052.4 4869.2,1052.4 4901.42,1084.62 4901.42,1199.57 4843,1257.99 R15.1
  Top Layer w20: U2.11 4775,1292.99 R15.1
  Bottom Layer w10: v1(4535,1280) 4535,1110 4605,1040 v1(4615,1040)
NetR16_1: R16.1 R20.1 TP25.1@5055,1875 U2.2 | length 525.6
  Top Layer w10: TP25.1@5055,1875 5035,1895 R20.1 5129.02,1987.01 R16.1
  Top Layer w20: U2.2 4975,1795 TP25.1@5055,1875
NetR16_2: R16.2 R17.1 | length 169.3
  Top Layer w10: R17.1@5184.8,1883.58 R17.1 5194.02,1913.2 5221.61,1940.8 5221.61,1953.62 R16.2
NetR17_2: R17.2 R22.1 TP26.1@5465,1874.36 U2.1 | length 597.9
  Top Layer w10: R22.1 5320,1787.99 R17.2 TP26.1@5464.99,1874.37
  Top Layer w20: U2.1 5147.24,1615.24 R22.1
NetR19_1: R19.1 R22.2 TP23.1@4680,1874.36 U2.6 | length 1179.9
  Top Layer w10: R19.1 4542.36,1874.36 TP23.1@4680,1874.36 ; 4775,1560 4825,1510 5041.86,1510 5096.86,1455 5163.14,1455 5210,1501.86 5210,1552.01 R22.2
  Top Layer w20: TP23.1@4680,1874.36 4775,1779.36 U2.6 4775,1560
NetR20_2: R20.2 R43.1 | length 121.2
  Top Layer w10: R20.2 5152.01,2112.99 R43.1
NetR24_1: R24.1 R28.1 TP30.1@4870,1875 U2.3 | length 522.3
  Top Layer w10: R28.1 R28.1@4832.99,1987.01 ; TP30.1@4870,1875 4870,1950 R28.1@4832.99,1987.01 ; R24.1 R28.1@4832.99,1987.01
  Top Layer w20: TP30.1@4870,1875 4925,1819.99 U2.3
NetR24_2: R24.2 R44.1 | length 123.6
  Top Layer w10: R44.1 4802.09,2112.99 R24.2
NetR26_2: R26.2 R30.2 TP29.1@4798.07,965 U2.5 | length 1291.1
  Top Layer w10: R26.2 R30.2 4835,865 4798.07,901.93 4798.07,965 4805.26,972.19 v1(4947.81,972.19)
  Top Layer w20: U2.5 v1(4825,1715.63)
  Bottom Layer w10: v1(4825,1715.63) 4947.81,1592.81 v1(4947.81,972.19)
NetR28_2: R28.2 R29.1 | length 115.7
  Top Layer w10: R29.1 4680,2014.02 R28.2
NetR31_1: R31.1 R40.1 | length 404.1
  Top Layer w10: v1(4403.17,852.01) 4480,775.18 4538.17,775.18 R40.1
  Bottom Layer w10: R31.1 4368.33,886.85 v1(4403.17,852.01)
NetR37_1: R37.1 T1.1 TP2.1@2365,3680 | length 504.7
  Top Layer w50: TP2.1@2365,3680 2407.99,3637.01 R37.1 2655,3525 T1.1@2715,3585
NetR41_2: R41.2 R42.1 | length 164.2
  Bottom Layer w50: R42.1 1930,3339.02 R41.2@1974.02,3295
VCC: C5.2 C6.1 D6.1 TP15.1@3023.59,1495 U1.8 | length 1621.2
  Top Layer w10: v1(2669.22,1830.94) 2669.22,1390.31 2688.59,1370.94 2899.53,1370.94 3023.59,1495 v1(3154.13,1495)
  Top Layer w20: U1.8 2374.06,1830.94 2433.11,1890 v1(2605,1890)
  Bottom Layer w10: C5.2 v1(2669.22,1830.94) ; C5.2@2583.59,1833.78 2578.59,1838.78 2605,1865.19 v1(2605,1890) ; D6.1 3154.13,1504.13 v1(3154.13,1495)
Vcs1: R5.2 R43.2 TB2.2 TP6.1@5228.63,2885 | length 1091.9
  Top Layer w10: R5.2 5134.02,2256.97 R43.2 ; TB2.2@5505,2885 TB2.2
  Top Layer w50: R5.2 5134.02,2504.02 TB2.2 ; TP6.1@5228.63,2885 TB2.2@5505,2885
Vdim: R26.1 TB3.1 | length 348.4
  Top Layer w10: TB3.1 4718.58,673.58 R26.1
Vout: C4.1 C11.2 R18.1 R33.1 R34.2 R38.1 TB2.1 TP4.1@5520,2305 U2.4 | length 6277.7
  Top Layer w10: 4875,1555 4895,1535 v1(5130,1535) ; v1(5135,1355) 5135,1217.95 C11.2 5314.45,1202.95 R33.1 v1(5420,860) ; R38.1 5230.04,3272.01 ; TP4.1@5510,2315 5520,2305 v1(5520,2100)
  Top Layer w20: 4875,1555 U2.4
  Top Layer w50: R34.2 5170,3635 5276.42,3528.58 5276.42,3318.39 5230.04,3272.01 5557.99,3272.01 5730,3100 5730,2900 TB2.1 5510,2455 TP4.1@5510,2315
  Top Layer w100: C4.1@4720,2885 4914.11,2885 5185.01,3155.96 R38.1
  Bottom Layer w10: R18.1 4566.34,860 v1(5420,860) ; v1(5135,1355) 5130,1360 v1(5130,1535) 5115,1550 5120,1550 5520,1950 v1(5520,2100)
Vout_aux: R39.2 T1.11 | length 461.3
  Bottom Layer w10: T1.11 2760.51,2595 2864.13,2491.38 2864.13,2309.25 2823.59,2268.7 R39.2
Vout_current_sense: R15.2 R40.2 TP28.1@4689.01,1215 U2.10 | length 764
  Top Layer w10: R40.2 4535,917.99 4535,1073.14 4658.43,1196.57 4679.2,1196.57 TP28.1@4689.01,1206.38 ; TP28.1@4689.01,1221.42 4689.01,1215 TP28.1@4689.01,1206.38 ; TP28.1@4721.79,1247.78 TP28.1@4725,1250.99 ; R15.2 4763.62,1178.39 4718.58,1178.39 4718.58,1215 4697.64,1215 TP28.1@4689.01,1206.38
  Top Layer w20: TP28.1@4689.01,1221.42 TP28.1@4718.58,1250.99 ; TP28.1@4725,1250.99 U2.10
Vref: R33.2 TP34.1@5580,1340 U2.8 U2.9 U2.12 | length 1259.9
  Top Layer w10: 4675,1465 4795,1465 ; 4825,1435 4795,1465 ; TP34.1@5580,1340 5574.56,1345.44 R33.2 5360.44,1405 5090,1405 5030,1465 4795,1465
  Top Layer w20: U2.9 4675,1465 U2.8 ; U2.12 4825,1435
ZCD/OPP_Pin: D6.2 R8.1 R39.1 TP12.1@3048.58,2159.56 | length 714.9
  Top Layer w10: v1(3043.59,2070.94) 3048.58,2075.94 TP12.1@3048.58,2159.56
  Bottom Layer w10: R8.1@2783.59,1884.96 2836.3,1937.68 3023.59,1937.68 3043.59,1957.68 v1(3043.59,2070.94) 3041.58,2072.95 R39.1
pads on no net: T1.3 T1.5 T1.6 T1.8 T1.9 T1.10 T1.12 TP1.1@2128.59,980.95 TP2.1@2365,3680 TP3.1@4100,3600 TP4.1@5520,2305 TP5.1@2355,2885 TP6.1@5228.62,2885 TP8.1@935,455 TP9.1@4505,2325 TP10.1@1870,3015 TP12.1@3048.59,2159.57 TP14.1@1625.04,2212.56 TP15.1@3023.59,1495 TP16.1@2562.09,1752.21 TP17.1@1910.79,2255 TP18.1@2128.44,1230.94 TP20.1@3015,1255 TP21.1@2003.59,2095.94 TP22.1@2725,1140 TP23.1@4680,1874.36 TP24.1@4385,1205 TP25.1@5055,1875 TP26.1@5465,1874.37 TP27.1@4495,1750 TP28.1@4689.02,1215 TP29.1@4798.07,965 TP30.1@4870,1875 TP31.1@3825,1965 TP32.1@4027.76,500 TP33.1@4180,335 TP34.1@5580,1340 TP35.1@5150,960 U1.1 U2.16

## Keep-outs
Keep-Out Layer:
  lines w10: -0.71,682.6 cw(c250,250) 681.56,-2.5 ; 1.93,3315.88 ccw(c250,3750) 683.82,3998.59 ; 5709.72,3996.73 ccw(c5750,3750) 5997.94,3718.01 ; 5745.37,0.04 cw(c5750,250) 5999.95,255
  lines w47.24: 0,0 6000,0 6000,4000 0,4000 0,0

## Other copper
Bottom Layer:
  text "50mil" at 1345,2466.81 h60

## Silkscreen, mask and mechanical layers (free items; w line width, h text height)
Top Overlay:
  drawing of 5 lines, arcs and shapes, not listed
  text "LED_N" at 5360,3060 h60
  text "AC_N" at 390,2875 h60
  text "LED_P" at 5375,2445 h60
  text "AC_L" at 400,2260 h60
  text "CU Boulder" at 2665.94,670 h70
  text "LED Driver" at 2664.37,560 h60
  text "ECEN 5009 CNP REV 01" at 2660,445 h60
  text "DIM_P" at 4340,335 h60 r90
  text "DIM_N" at 4940,325 h60 r90
  text "Chinmay Patil" at 2665,315 h70

## Text inside footprints (layer, text, board x,y; h text height)
C1: Top Overlay "+" at 1905.39,405.69 h20; Top Overlay "-" at 1139.86,408.41 h20; Mechanical 15 "-" at 1138.84,408.18 h20; Mechanical 15 "+" at 1904.4,405.69 h20
C2: Top Overlay "-" at 1016.22,1088.31 h20 r90; Top Overlay "+" at 1859.57,633.46 h20; Mechanical 15 "-" at 1199.17,1252.83 h20 r180; Mechanical 15 "+" at 1796.57,1031.1 h20
C4: Top Overlay "-" at 4108.53,2844.63 h20; Top Overlay "+" at 4931.16,2847.82 h20; Mechanical 15 "+" at 4930.16,2847.82 h20; Mechanical 15 "-" at 4107.51,2844.41 h20
TB1: Top Overlay "1" at 476.56,2835.24 h20 r270
TB2: Top Overlay "1" at 5527.53,2539.76 h20 r90
TB3: Top Overlay "1" at 4369.76,447.47 h20